# Altium PCB RemoteFK01.PcbDoc
Units mm, origin at the board's own origin, x right, y up, seen from the top; angles counter-clockwise.
Board outline 152.4 x 101.6 mm, 2 copper layers (Top Layer, Bottom Layer); 10 components, 9 nets, 39 pads, 0 vias.
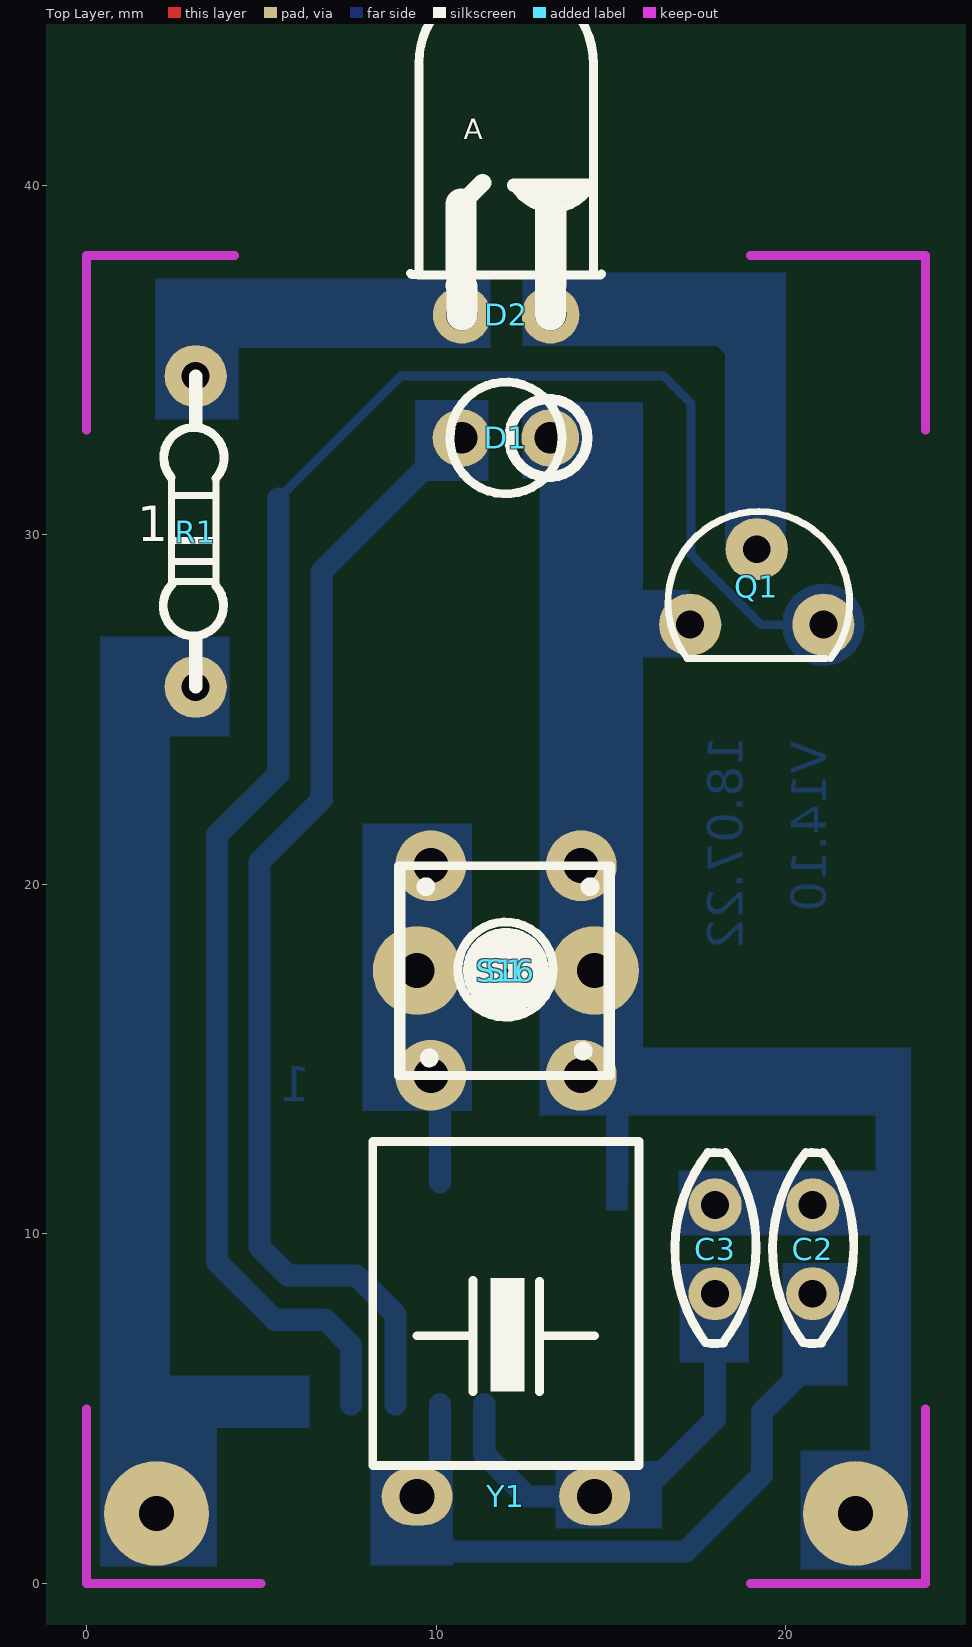
[diagram p0: Top Layer view]
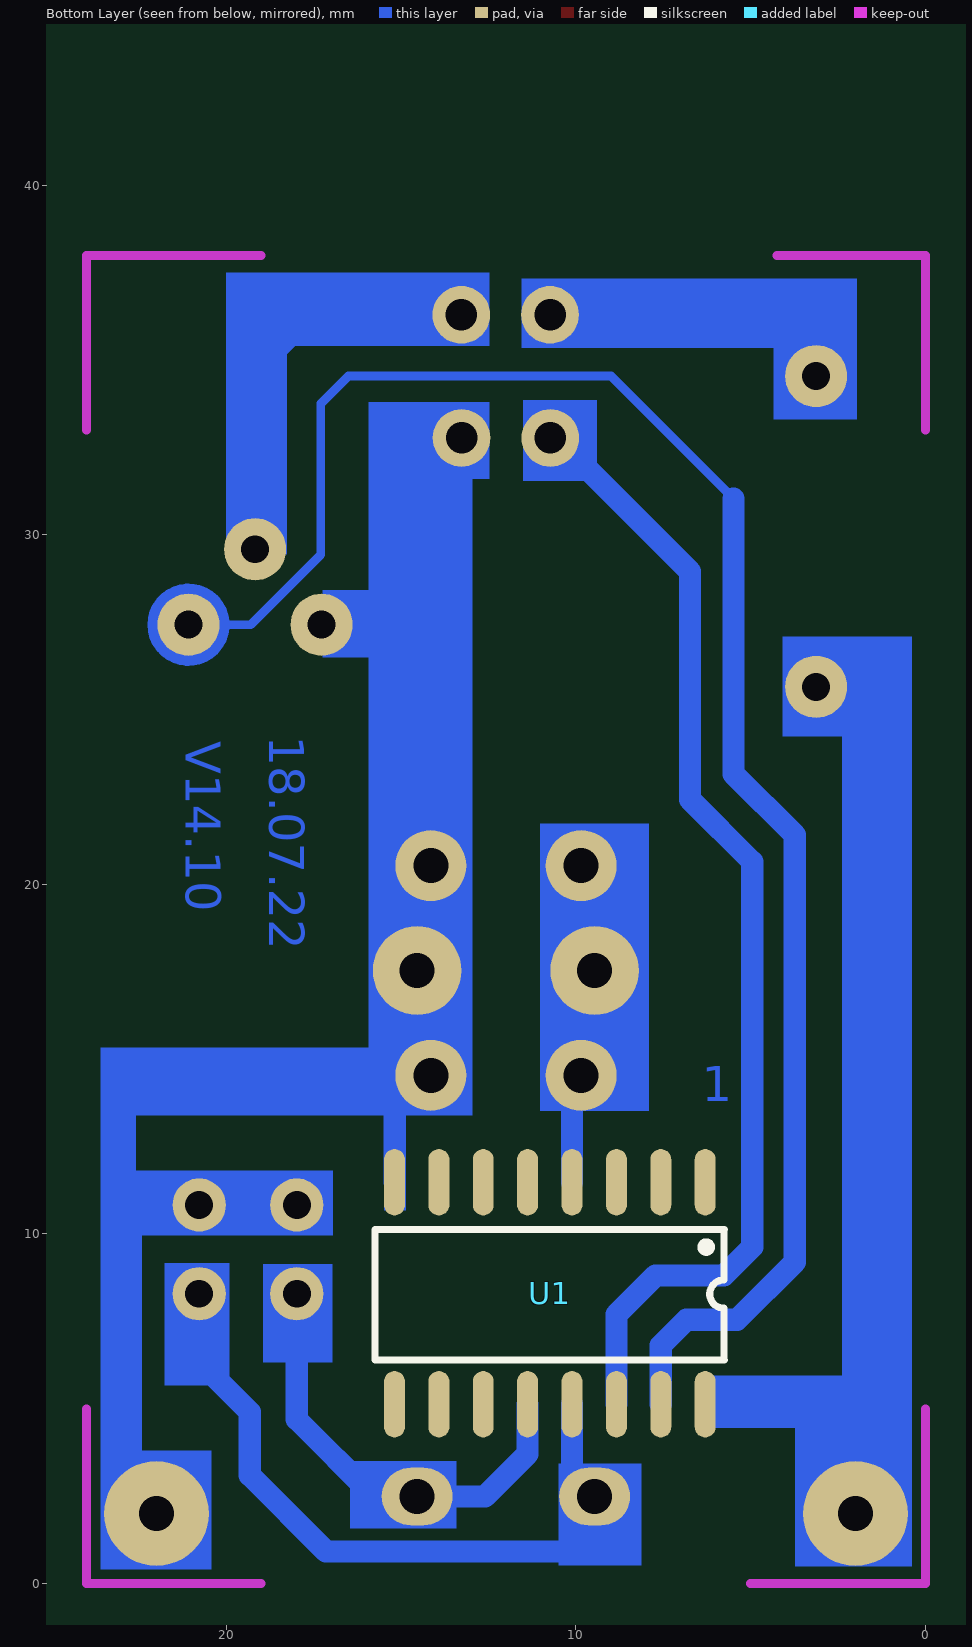
[diagram p1: Bottom Layer view, seen from below]

## Layer stack, top to bottom
Top Solder: solder mask 0.0102, Solder Resist, Dk 3.5
Top Layer: signal copper 0.0356
Dielectric 1: dielectric 0.32, FR-4, Dk 4.8
Bottom Layer: signal copper 0.0356
Bottom Solder: solder mask 0.0102, Solder Resist, Dk 3.5

## Board outline
-53.848,-52.162 98.552,-52.162 98.552,49.438 -53.848,49.438

## Design rules (kind name [scope] priority, off if disabled: settings)
Clearance [All] p1: gap=0.254
PolygonConnect [All] p1: connectstyle=Relief reliefconductorwidth=0.254 reliefentries=4 polygonreliefangle="90 Angle" airgapwidth=0.254
RoutingVias [All] p1: holewidth=0.711 width=1.27 viastyle="Through Hole" minholewidth=0.711 minwidth=1.27 maxholewidth=0.711 maxwidth=1.27
SolderMaskExpansion [All] p1: expansion=0.102
Width [All] p1: maxlimit=2.54 minlimit=0.254 preferedwidth=0.508 minimp=50.000000 maximp=50.000000 favimp=50.000000
29 further rules are at their usual default settings.

## Classes and differential pairs
component class remoteFK01: C2 C3 D1 D2 Q1 R1 S1 U1 Y1

## Components (designator, comment, footprint, x,y, rotation, side; value= is the part's Value field where it differs from the comment)
C2 "100PF" RAD0.1 20.777,10.83 r270 top
C3 "100PF" RAD0.1 17.983,10.83 r270 top
D1 "Red" LED0.3 12,32.775 r0 top locked
D2 "Ir Transmitter" LED0.5-L 12,37.439 r0 top locked
Q1 "C945" TO92BS2 19.177,28.067 r180 top
R1 "1" RES0.35 3.124,34.544 r270 top
S1 "On/Off" PUSHBOT2 12,17.536 r180 top locked
S16 "100/2W" PUSHBOT4 12,17.536 r270 top
U1 "Ir Receiver" SOIC16 6.299,11.481 r270 bottom
Y1 "455KHz" XTALRLOB 12,2.489 r0 top

## Footprints (in the part's own frame and the unit in brackets; to place one, negate y for a bottom-side part, rotate by r counter-clockwise, add the part's x,y. Pads: shape width x height; smd on the part's side, far side on the other; paste and mask are expansions set on the pad)
LED0.3 [mil] "LED 3mm"
  round 65 hole 35.43: 1(-50,0) 2(50,0)
  silkscreen extent -63,-63 92,63
LED0.5-L [mil] "LED 0.5mm(lied on board)"
  round 65 hole 35.43: 1(-49.71,-44.84) 2(50.29,-44.84)
  silkscreen extent -108,-45 108,335
PUSHBOT2 [mm] "NO-2pin"
  round 2.54 hole 1: 1(-2.54,0) 2(2.54,0)
  silkscreen extent -2.92,-3 3.08,3
PUSHBOT4 [mm]
  round 2.032 hole 1: 1(3,-2.15) 2(3,2.15) 3(-3,-2.15) 4(-3,2.15)
  silkscreen extent -3,-3 3,3
RAD0.1 [mil]
  round 60 hole 31.5: 1(0,0) 2(100,0)
  silkscreen extent -59,-45 156,46
RES0.35 [mil] "Diode, Axial; Body 5.2 x 2.7 mm (LxDia. max), Lead Dia. 0.86 mm (max)"
  round 70 hole 31.5: 1(0,0)
  round 70 hole 31.5 paste+0: 2(350,0)
  silkscreen extent 0,-37 350,32
SOIC16 [mm] "SOIC, 16-Leads, Body 9.9x3.9mm, Pitch 1.27mm, IPC High Density"
  oval 1.9x0.6 smd: 1(0,0) 2(0,-1.27) 3(0,-2.54) 4(0,-3.81) 5(0,-5.08) 6(0,-6.35) 7(0,-7.62) 8(0,-8.89) 9(6.351,-8.89) 10(6.351,-7.62) 11(6.351,-6.35) 12(6.351,-5.08) 13(6.351,-3.81) 14(6.351,-2.54) 15(6.351,-1.27) 16(6.351,0)
  silkscreen extent 1.35,-9.44 5.08,0.55, body extent 0.4,-9.4 5.97,0.51, height 1.75
TO92BS2 [mil] "NPN-CC5551,C945 Base Side"
  round 70 hole 31.5: 1(-75,25) 2(0,-60) 3(75,25)
  silkscreen extent -105,-102 100,63
XTALRLOB [mil] "455KHz- Ir Remote"
  oval 80x65 hole 39.37: 1(-100,0) 2(100,0)
  silkscreen extent -150,35 150,400

## Part data
C2 C3: library part Cap, "Capacitor np"
D1: library part LED0.5, "LED Radial 0.3"
D2: library part LED0.5, "LED Radial 0.5"
Q1: library part BC337, "NPN General Purpose Amplifier"
R1: library part Resistor, "Resistor"
S1: library part SW-PB, "6x6x5"
U1: library part SC5104, "Fan Ir. Receiver"
Y1: library part CRYSTAL, "Crystal"

## Free pads (board coordinates)
  round 3 hole 1: 2(2,2) 3(22,2)

## Nets (pads, with @x,y where several pads share a name; then routed paths per layer and width w, separated by ;. In a path a pad name is that pad's centre, name@x,y a point inside that pad or via, vN(x,y) a via of type N, cw(c..) or ccw(c..) an arc to the next point about the centre after c; other vN are vias at no path point)
+BAT: pad.2 R1.2 U1.16 | length 27.2
  Bottom Layer w0.635: pad.2@2,3 2,5.055 ; 2,26.4 2,5.055 ; 5.841,5.055 2,5.055
-BAT: C2.1 C3.1 D1.2 pad.3 Q1.3 S1.1 S16.2 S16.4 U1.8 | length 38.6
  Bottom Layer w0.635: S16.2 S16.4 ; U1.8 15.189,14.308 15.418,14.536 21.379,14.536
  Bottom Layer w0.889: 14.275,27.356 Q1.3@17.272,27.356 ; S1.1 14.54,24.128 ; C3.1 C2.1 22.597,10.83 22.86,10.566 22.86,2.86 pad.3
NetC2_2: C2.2 U1.13 Y1.1 | length 17.6
  Bottom Layer w0.635: Y1.1@10.109,3.138 U1.13 ; 10.389,0.914 17.145,0.914 19.329,3.099 19.329,4.902 20.777,6.35 C2.2
NetC3_2: C3.2 U1.12 Y1.2 | length 13
  Bottom Layer w0.635: U1.12 11.379,3.708 12.598,2.489 Y1.2 15.773,2.489 17.983,4.699 C3.2
NetD1_1: D1.1 U1.14 | length 32.9
  Bottom Layer w0.635: U1.14 8.839,7.696 7.722,8.814 5.766,8.814 4.953,9.627 4.953,20.65 6.731,22.428 6.731,28.956 10.55,32.775 D1.1
NetD2_1: D2.1 R1.1 | length 8.6
  Bottom Layer w0.635: R1.1@2.884,34.406 4.779,36.3 D2.1
NetD2_2: D2.2 Q1.2 | length 10.9
  Bottom Layer w0.635: D2.2 17.582,36.3 19.177,34.706 Q1.2@19.177,30.388
NetQ1_1: Q1.1 U1.15 | length 57.4
  Bottom Layer w0.254: 5.486,31.039 8.992,34.544 16.51,34.544 17.297,33.757 17.297,29.439 19.304,27.432 Q1.1
  Bottom Layer w0.508: 22.005,27.432 ccw(c21.082,27.432) 22.005,27.432
  Bottom Layer w0.635: 5.486,31.039 5.486,23.165 3.734,21.412 3.734,9.195 5.385,7.544 6.833,7.544 7.569,6.807 U1.15
NetS1_2: S1.2 S16.1 S16.3 U1.4 | length 9.2
  Bottom Layer w0.635: S16.3 S16.1 10.109,14.277 U1.4
pads on no net: U1.1 U1.2 U1.3 U1.5 U1.6 U1.7 U1.9 U1.10 U1.11

## Keep-outs
Keep-Out Layer:
  lines w0.254: 0,5 0,0 5,0 ; 0,33 0,38 4.24,38 ; 19,0 24,0 24,5 ; 19,38 24,38 24,33

## Other copper
Bottom Layer:
  rectangle net +BAT: 0.381,0.483 3.734,5.944
  rectangle net +BAT: 3.734,4.445 6.375,5.944
  rectangle net +BAT: 0.381,5.944 2.388,27.102
  rectangle net +BAT: 2.388,24.232 4.089,27.102
  rectangle net NetS1_2: 7.899,13.513 11.024,21.742
  rectangle net -BAT: 12.954,13.386 15.926,33.807
  rectangle net -BAT: 16.942,9.957 23.368,11.811
  rectangle net -BAT: 22.581,0.406 23.597,13.386
  rectangle net -BAT: 20.422,0.406 22.581,3.81
  rectangle net -BAT: 15.926,13.386 23.597,15.342
  rectangle net NetC2_2: 8.128,0.508 10.49,3.429
  rectangle net NetC3_2: 13.411,1.575 16.459,3.505
  rectangle net NetC2_2: 19.914,5.664 21.768,9.169
  rectangle net NetC3_2: 16.967,6.325 18.948,9.144
  rectangle net -BAT: 14.859,10.668 15.494,13.691
  rectangle net -BAT: 15.596,26.492 17.247,28.423
  rectangle net NetD2_2: 18.263,29.439 20.015,37.516
  rectangle net NetD2_2: 12.471,35.408 18.263,37.516
  rectangle net NetD2_1: 1.956,35.357 11.557,37.338
  rectangle net NetD2_1: 1.956,33.299 4.343,35.357
  rectangle net NetD1_1: 9.398,31.547 11.506,33.858
  rectangle net -BAT: 12.471,31.598 12.954,33.807
  text "18.07.22" at 18.771,24.257 h1 r90
  text "V14.10" at 21.158,24.105 h1 r90
  text "1" at 6.401,13.792 h1

## Text inside footprints (layer, text, board x,y; h text height)
D2: Top Overlay "A" at 10.788,41.124 h1